# Altium PCB LED ring V1.PcbDoc
Units mm, origin at the board's own origin, x right, y up, seen from the top; angles counter-clockwise.
Board outline 116 x 70.3 mm, 2 copper layers (Top Layer, Bottom Layer); 46 components, 54 nets, 171 pads, 94 vias.
Unrouted connection lines stored in the file: 3.
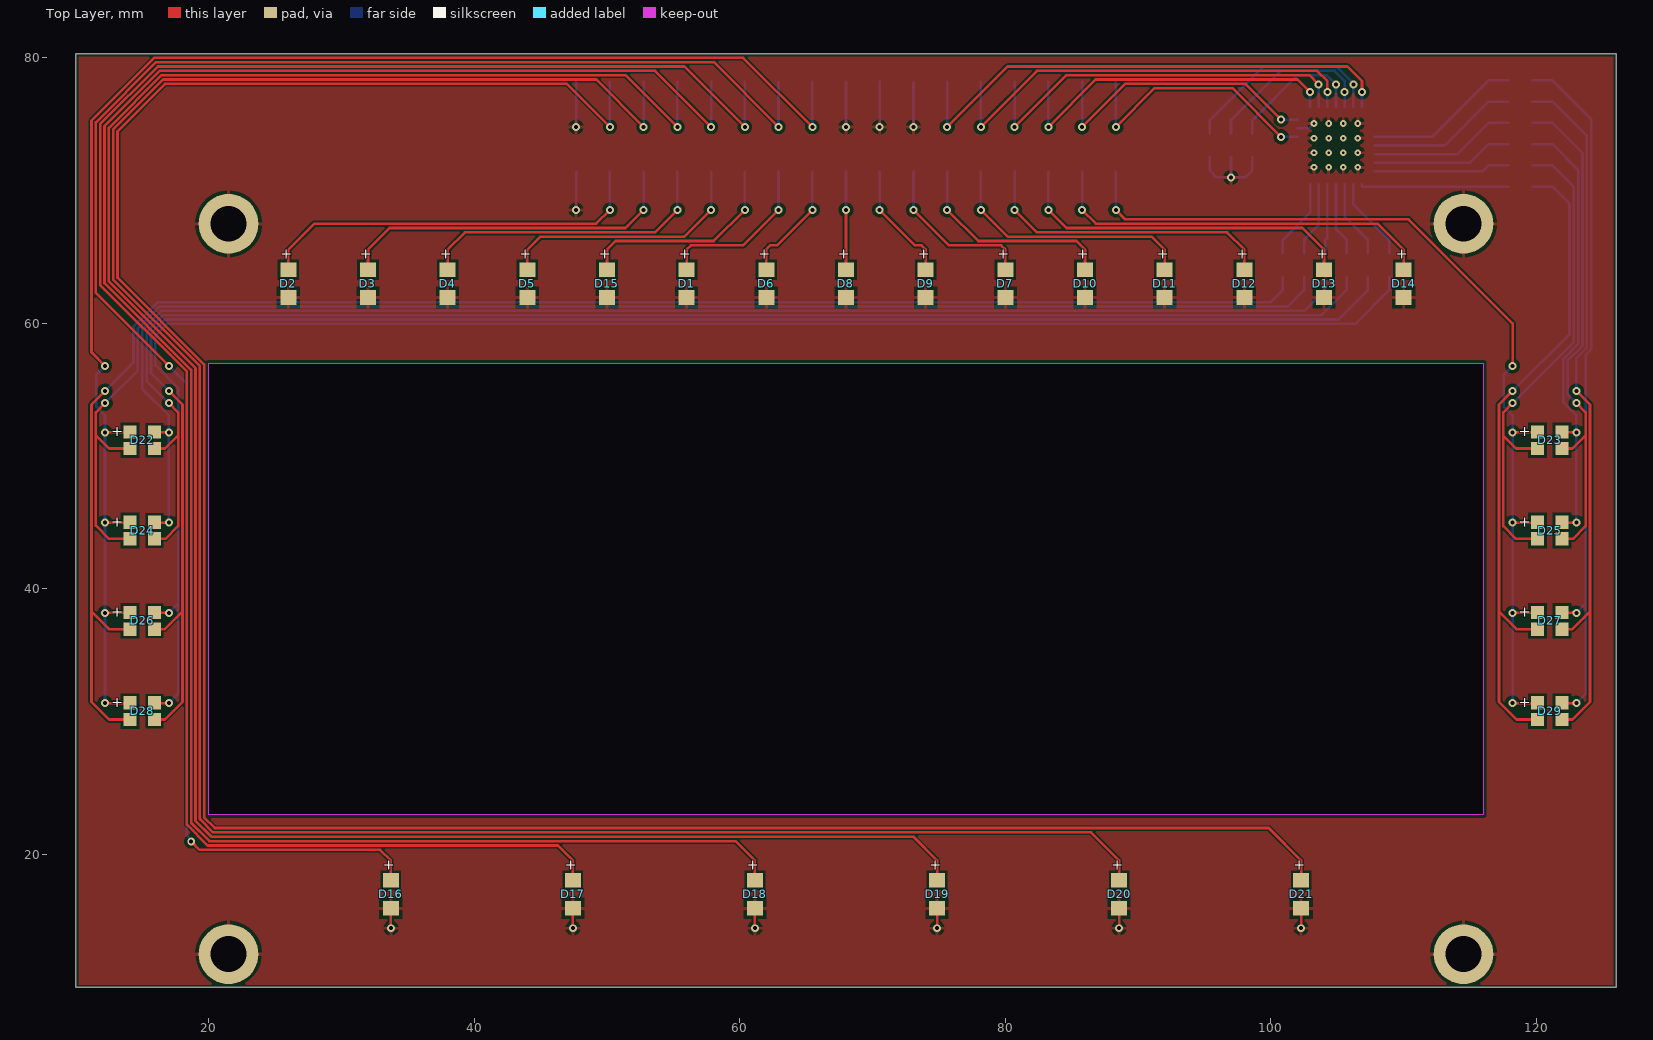
[diagram p0: Top Layer view]
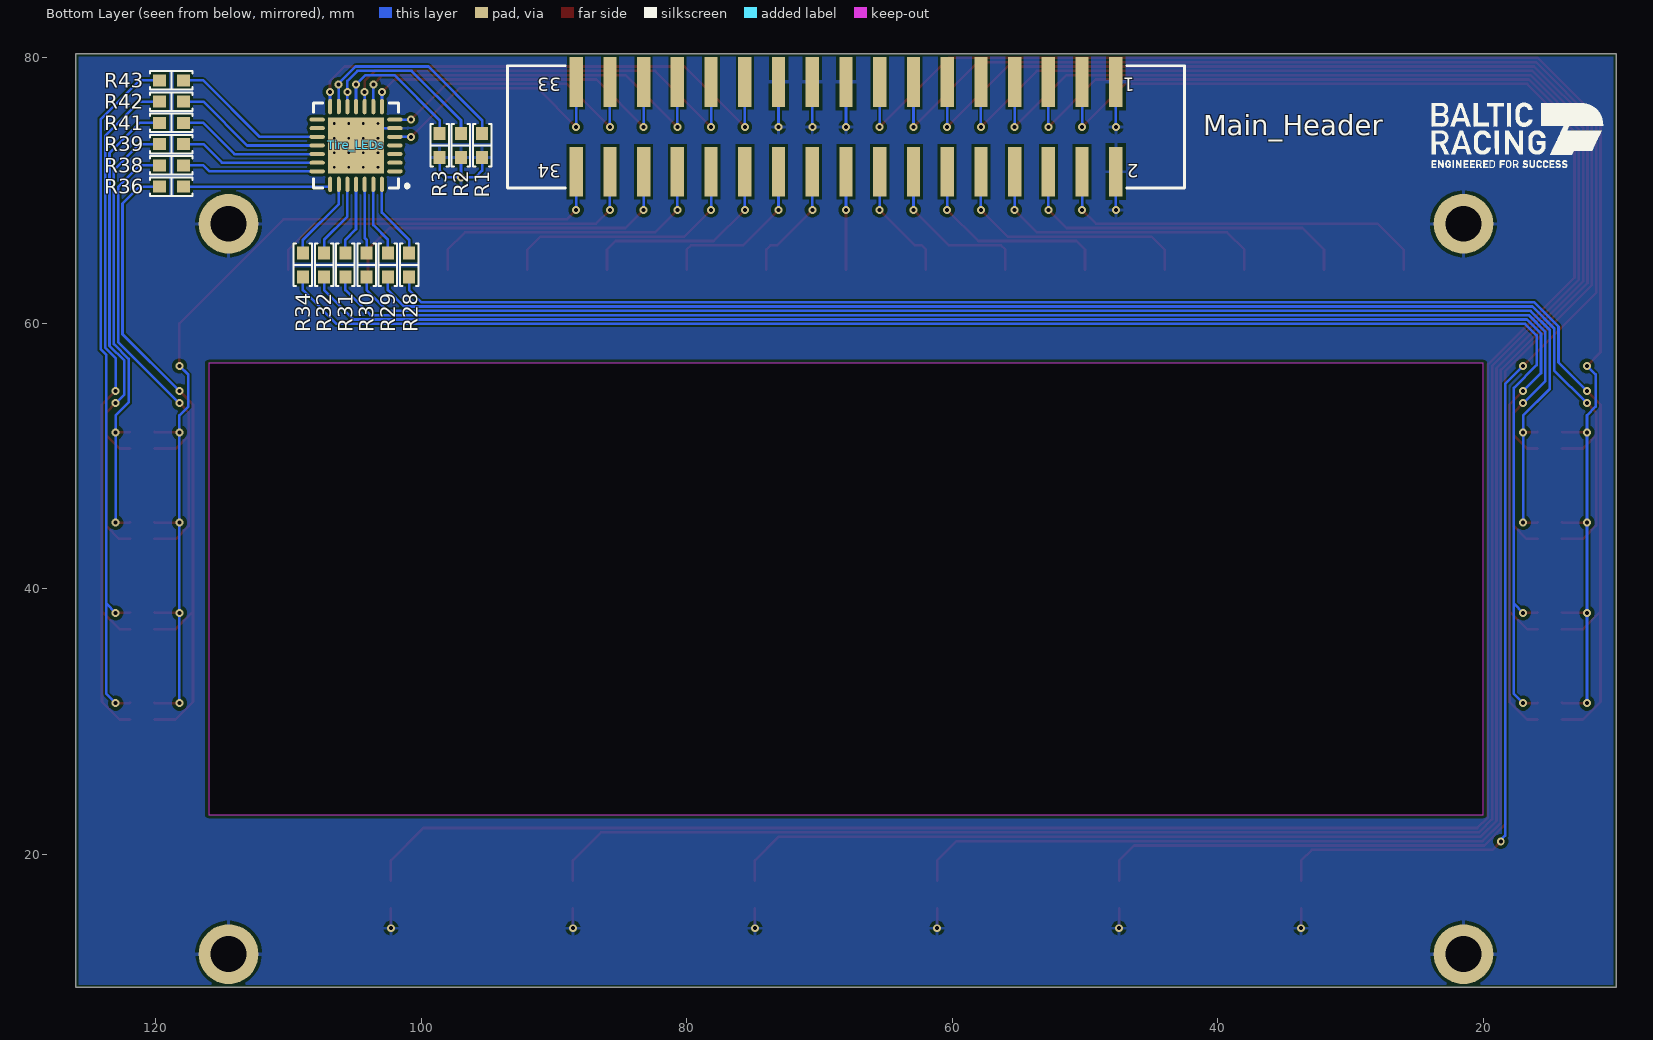
[diagram p1: Bottom Layer view, seen from below]
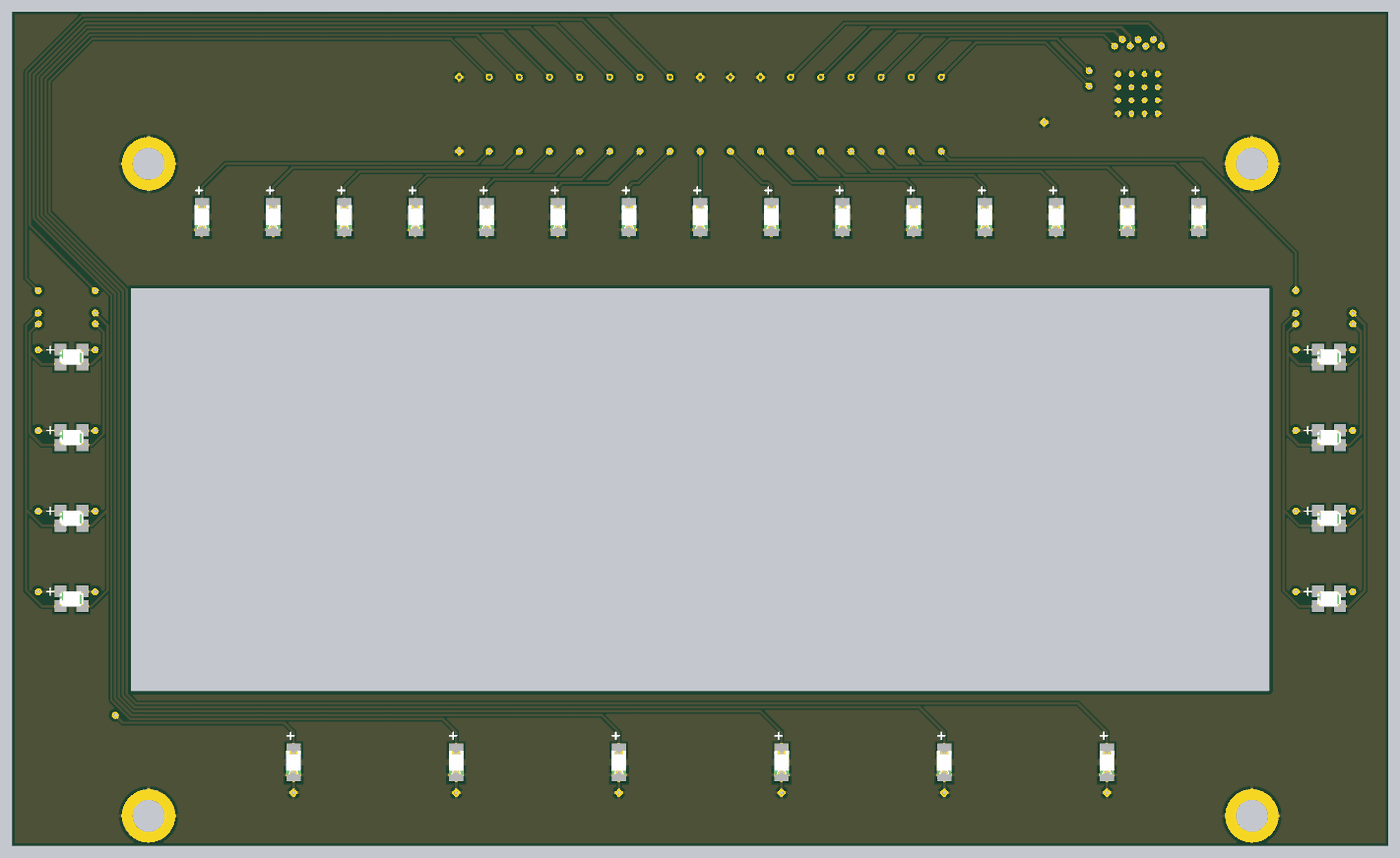
[diagram p2: 3D render of the assembled board from above, using the file's embedded part models]
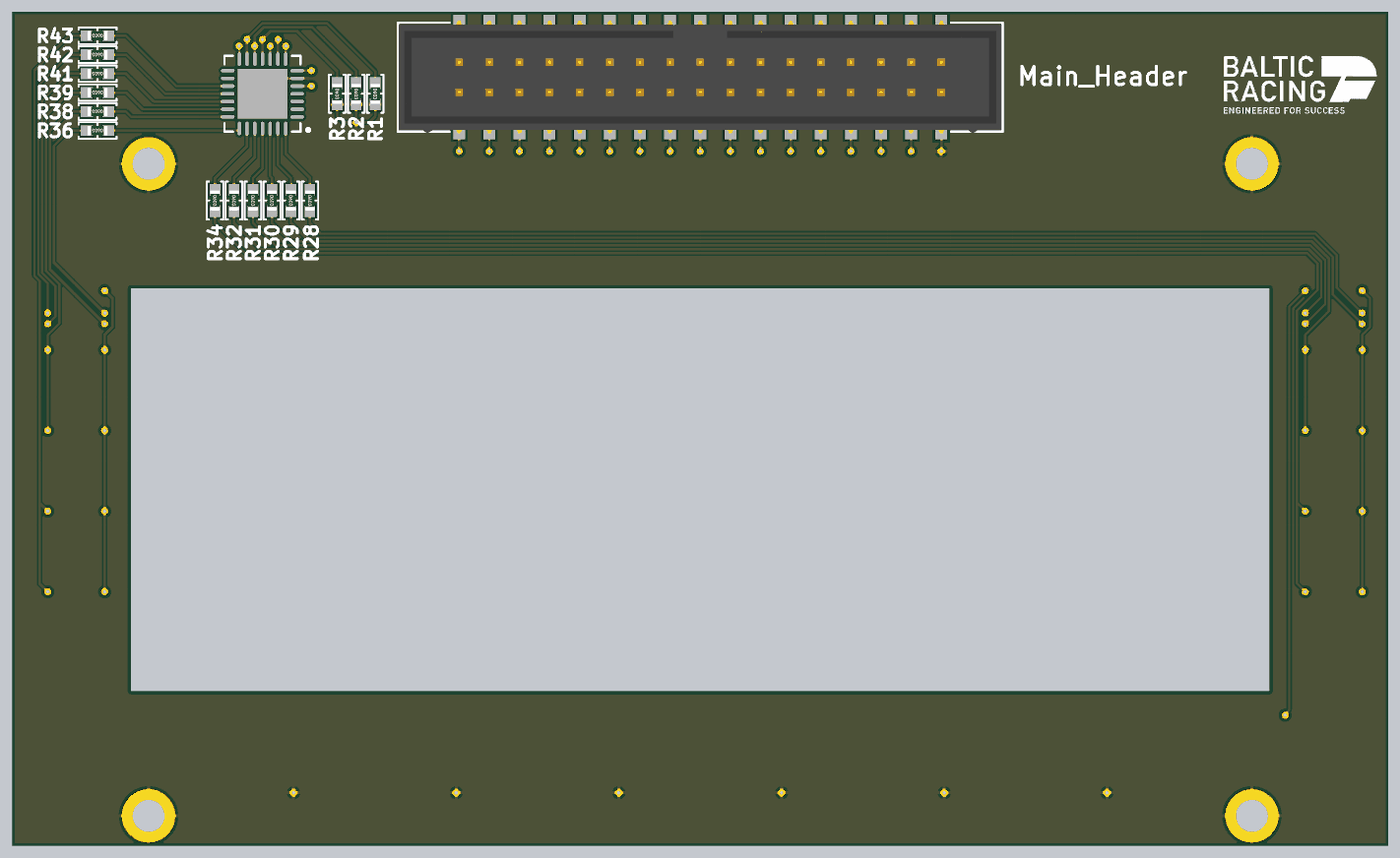
[diagram p3: 3D render of the assembled board from below, using the file's embedded part models]

## Layer stack, top to bottom
Top Solder: solder mask 0.0102, Solder Resist, Dk 3.5
Top Layer: signal copper 0.0356
Dielectric 1: dielectric 0.32, FR-4, Dk 4.8
Bottom Layer: signal copper 0.0356
Bottom Solder: solder mask 0.0102, Solder Resist, Dk 3.5

## Board outline
10,10 126,10 126,80.3 10,80.3
cut-out: 20,57 116,57 116,23 20,23

## Design rules (kind name [scope] priority, off if disabled: settings)
BoardOutlineClearance [All] p1: gap=0.2 ignorepadtopadclearanceinfootprint=FALSE // Trace to V-cut >0.4mm
Clearance [All] p1: gap=0.254 ignorepadtopadclearanceinfootprint=TRUE except(0: Arc-Hole Track-Hole SMDPad-Hole THPad-Hole Via-Hole Fill-Hole Poly-Hole Region-Hole Text-Hole; 0.127: Arc-Arc Arc-Track Arc-Fill Arc-Poly Arc-Region Track-Track Track-Fill Track-Poly Track-Region SMDPad-SMDPad; 0.15: Arc-Text Track-Text SMDPad-Text THPad-Text Via-Text Fill-Text Poly-Text Region-Text Text-Text; 0.2: Arc-SMDPad Track-SMDPad SMDPad-Fill SMDPad-Poly SMDPad-Region; 0.33: Arc-THPad Track-THPad THPad-Fill THPad-Poly THPad-Region; 0.5: SMDPad-THPad THPad-THPad THPad-Via)
DiffPairsRouting [All] p1: maxlimit=10 minlimit=0.254 mostfreqgap=0.254 toplayer_minwidth=0.127 toplayer_maxwidth=5 toplayer_prefwidth=0.254 bottomlayer_minwidth=0.127 bottomlayer_maxwidth=5 bottomlayer_prefwidth=0.254 maxuncoupledlength=12.7
HoleSize [All] p1: absolutevalues=TRUE maxlimit=6.3 minlimit=0.2 maxpercent=80.000 minpercent=20.000 // Finished hole size tolerance +0.13/-0.08mm
HoleToHoleClearance [All] p1: gap=0.5 allowstackedmicrovias=TRUE
MinimumAnnularRing [All] p1: minimumring=0.13 // 1oz Copper
PolygonConnect [All] p1: connectstyle=Relief reliefconductorwidth=0.254 reliefentries=4 polygonreliefangle="90 Angle" airgapwidth=0.254
RoutingVias [All] p1: holewidth=0.711 width=1.27 viastyle="Through Hole" minholewidth=0.3 minwidth=0.6 maxholewidth=0.711 maxwidth=1.27
SolderMaskExpansion [All] p1: expansion=0.05 istentingtop=FALSE
Width [All] p1: maxlimit=4.5 minlimit=0.1 preferedwidth=0.254 minimp=50.000000 maximp=50.000000 favimp=50.000000
27 further rules are at their usual default settings.

## Components (designator, comment, footprint, x,y, rotation, side; value= is the part's Value field where it differs from the comment)
D1 "Red, 2V" WL-SMCW_0805 56,63 r90 top
D2 "Blue, 3.2V" WL-SMCW_0805 26,63 r90 top
D3 "Blue, 3.2V" WL-SMCW_0805 32,63 r90 top
D4 "Blue, 3.2V" WL-SMCW_0805 38,63 r90 top
D5 "Blue, 3.2V" WL-SMCW_0805 44,63 r90 top
D6 "Red, 2V" WL-SMCW_0805 62,63 r90 top
D7 "Green, 3.2V" WL-SMCW_0805 80,63 r90 top
D8 "Yellow, 2V" WL-SMCW_0805 68,63 r90 top
D9 "Yellow, 2V" WL-SMCW_0805 74,63 r90 top
D10 "Green, 3.2V" WL-SMCW_0805 86,63 r90 top
D11 "Green, 3.2V" WL-SMCW_0805 92,63 r90 top
D12 "Green, 3.2V" WL-SMCW_0805 98,63 r90 top
D13 "Green, 3.2V" WL-SMCW_0805 104,63 r90 top
D14 "Green, 3.2V" WL-SMCW_0805 110,63 r90 top
D15 "Blue, 3.2V" WL-SMCW_0805 50,63 r90 top
D16 "Red, 2V" WL-SMCW_0805 33.72,17 r90 top
D17 "Red, 2V" WL-SMCW_0805 47.43,17 r90 top
D18 "Red, 2V" WL-SMCW_0805 61.14,17 r90 top
D19 "Red, 2V" WL-SMCW_0805 74.86,17 r90 top
D20 "Red, 2V" WL-SMCW_0805 88.57,17 r90 top
D21 "Red, 2V" WL-SMCW_0805 102.28,17 r90 top
D22 "Red & Green & Blue" WL-SFCW_0805 15,51.2 r0 top
D23 "Red & Green & Blue" WL-SFCW_0805 121,51.2 r0 top
D24 "Red & Green & Blue" WL-SFCW_0805 15,44.4 r0 top
D25 "Red & Green & Blue" WL-SFCW_0805 121,44.4 r0 top
D26 "Red & Green & Blue" WL-SFCW_0805 15,37.6 r0 top
D27 "Red & Green & Blue" WL-SFCW_0805 121,37.6 r0 top
D28 "Red & Green & Blue" WL-SFCW_0805 15,30.8 r0 top
D29 "Red & Green & Blue" WL-SFCW_0805 121,30.8 r0 top
Main_Header "61233420621" 61233420621 68,74.8 r0 bottom
R1 "SMD Resistor" "STACKPOLE CSR0603" 95.4,73.4 r270 bottom value=10k
R2 "SMD Resistor" "STACKPOLE CSR0603" 97,73.4 r270 bottom value=10k
R3 "SMD Resistor" "STACKPOLE CSR0603" 98.6,73.4 r270 bottom value=10k
R28 "SMD Resistor" "STACKPOLE CSR0603" 100.9,64.4 r270 bottom value=120
R29 "SMD Resistor" "STACKPOLE CSR0603" 102.5,64.4 r270 bottom value=120
R30 "SMD Resistor" "STACKPOLE CSR0603" 104.1,64.4 r270 bottom value=270
R31 "SMD Resistor" "STACKPOLE CSR0603" 105.7,64.4 r270 bottom value=470
R32 "SMD Resistor" "STACKPOLE CSR0603" 107.3,64.4 r270 bottom value=470
R34 "SMD Resistor" "STACKPOLE CSR0603" 108.9,64.4 r270 bottom value=270
R36 "SMD Resistor" "STACKPOLE CSR0603" 118.8,70.3 r0 bottom value=120
R38 "SMD Resistor" "STACKPOLE CSR0603" 118.8,71.9 r0 bottom value=120
R39 "SMD Resistor" "STACKPOLE CSR0603" 118.8,73.5 r0 bottom value=270
R41 "SMD Resistor" "STACKPOLE CSR0603" 118.8,75.1 r0 bottom value=470
R42 "SMD Resistor" "STACKPOLE CSR0603" 118.8,76.7 r0 bottom value=470
R43 "SMD Resistor" "STACKPOLE CSR0603" 118.8,78.3 r0 bottom value=270
Tire_LEDs "MCP23S17T-E/ML" QFN-ML28_M 104.9,73.4 r0 bottom

## Footprints (in the part's own frame and the unit in brackets; to place one, negate y for a bottom-side part, rotate by r counter-clockwise, add the part's x,y. Pads: shape width x height; smd on the part's side, far side on the other; paste and mask are expansions set on the pad)
61233420621 [mm] "WR-BHD 2.54mm Male SMT Box Header (Reel), 34p"
  rect 1x3.75 smd: 1(-20.32,-3.375) 2(-20.32,3.375) 3(-17.78,-3.375) 4(-17.78,3.375) 5(-15.24,-3.375) 6(-15.24,3.375) 7(-12.7,-3.375) 8(-12.7,3.375) 9(-10.16,-3.375) 10(-10.16,3.375) 11(-7.62,-3.375) 12(-7.62,3.375) 13(-5.08,-3.375) 14(-5.08,3.375) 15(-2.54,-3.375) 16(-2.54,3.375) 17(0,-3.375) 18(0,3.375) 19(2.54,-3.375) 20(2.54,3.375) 21(5.08,-3.375) 22(5.08,3.375) 23(7.62,-3.375) 24(7.62,3.375) 25(10.16,-3.375) 26(10.16,3.375) 27(12.7,-3.375) 28(12.7,3.375) 29(15.24,-3.375) 30(15.24,3.375) 31(17.78,-3.375) 32(17.78,3.375) 33(20.32,-3.375) 34(20.32,3.375)
  silkscreen extent -25.49,-4.6 25.49,4.6, body extent -25.4,-4.75 25.4,4.75, height 10.55
QFN-ML28_M [mm] "QFN, 28-Leads, Body 6x6mm, Pitch 0.65mm, Thermal Pad 4.2x4.2mm, IPC Low Density"
  oval 1.15x0.3 smd: 1(-2.925,1.95) 2(-2.925,1.3) 3(-2.925,0.65) 4(-2.925,0) 5(-2.925,-0.65) 6(-2.925,-1.3) 7(-2.925,-1.95) 15(2.925,-1.95) 16(2.925,-1.3) 17(2.925,-0.65) 18(2.925,0) 19(2.925,0.65) 20(2.925,1.3) 21(2.925,1.95)
  oval 0.3x1.15 smd: 8(-1.95,-2.925) 9(-1.3,-2.925) 10(-0.65,-2.925) 11(0,-2.925) 12(0.65,-2.925) 13(1.3,-2.925) 14(1.95,-2.925) 22(1.95,2.925) 23(1.3,2.925) 24(0.65,2.925) 25(0,2.925) 26(-0.65,2.925) 27(-1.3,2.925) 28(-1.95,2.925)
  rect 4.2x4.2 smd: 29(0,0)
  silkscreen extent -3.97,-3.2 3.2,3.2, body extent -3.05,-3.05 3.05,3.05, height 1
"STACKPOLE CSR0603" [mm] "Chip Resistor, 2-Leads, Body 1.60x0.80mm, IPC Medium Density"
  rect 1x0.9 smd: 1(-0.9,0) 2(0.9,0)
  silkscreen extent -1.6,-0.7 1.6,0.7, body extent -0.85,-0.4 0.85,0.4, height 0.45
WL-SFCW_0805 [mm] "SMD Full-color Chip LED Waterclear, body 2x1.3mm"
  rect 1x1 smd: 1(0.925,0.625) 2(0.925,-0.625) 3(-0.925,-0.625) 4(-0.925,0.625)
  body extent -1,-0.65 1,0.65, height 0.5
WL-SMCW_0805 [mm] "SMD Mono-color Chip LED, body 2.0x1.25mm"
  rect 1.1x1.2 smd: 1(-1.05,0) 2(1.05,0)
  body extent -1,-0.63 1,0.62, height 0.7

## Part data
D1 D6 D16 D17 D18 D19 D20 D21: library part 150080RS75000, "WL-SMCW SMT Mono-color Chip LED Waterclear, size 0805, Red, 2V, 140deg", Emitting Color=Red, Forward Voltage typ.=2V, Operating Temperature="-40 to +85degC", Chip Technology=AlInGaP, ComponentLink1Description=Manufacturer, ComponentLink1URL=http://www.we-online.de, ComponentLink2Description=Datasheet, ComponentLink2URL=https://www.we-online.com/catalog/datasheet/150080RS75000.pdf, Dominant Wavelength typ.=625nm, Luminous Intensity typ.=150mcd, Mounting Technology=SMT, Packaging="Tape and Reel", Part Number=150080RS75000, Peak Wavelength typ.=630nm, Published Date="December 2019", Publisher="Wurth Elektronik", Size=0805, Viewing Angle=140deg
D2 D3 D4 D5 D15: library part 150080BS75000, "WL-SMCW SMT Mono-color Chip LED Waterclear, size 0805, Blue, 3.2V, 140deg", Emitting Color=Blue, Forward Voltage typ.=3.2V, Operating Temperature="-40 to +85degC", Chip Technology=InGaN, ComponentLink1Description=Manufacturer, ComponentLink1URL=http://www.we-online.de, ComponentLink2Description=Datasheet, ComponentLink2URL=https://www.we-online.com/catalog/datasheet/150080BS75000.pdf, Dominant Wavelength typ.=470nm, Luminous Intensity typ.=145mcd, Mounting Technology=SMT, Packaging="Tape and Reel", Part Number=150080BS75000, Peak Wavelength typ.=465nm, Published Date="December 2019", Publisher="Wurth Elektronik", Size=0805, Viewing Angle=140deg
D7 D10 D11 D12 D13 D14: library part 150080GS75000, "WL-SMCW SMT Mono-color Chip LED Waterclear, size 0805, Green, 3.2V, 140deg", Emitting Color=Green, Forward Voltage typ.=3.2V, Operating Temperature="-40 to +85degC", Chip Technology=InGaN, ComponentLink1Description=Manufacturer, ComponentLink1URL=http://www.we-online.de, ComponentLink2Description=Datasheet, ComponentLink2URL=https://www.we-online.com/catalog/datasheet/150080GS75000.pdf, Dominant Wavelength typ.=525nm, Luminous Intensity typ.=450mcd, Mounting Technology=SMT, Packaging="Tape and Reel", Part Number=150080GS75000, Peak Wavelength typ.=515nm, Published Date="December 2019", Publisher="Wurth Elektronik", Size=0805, Viewing Angle=140deg
D8 D9: library part 150080YS75000, "WL-SMCW SMT Mono-color Chip LED Waterclear, size 0805, Yellow, 2V, 140deg", Emitting Color=Yellow, Forward Voltage typ.=2V, Operating Temperature="-40 to +85degC", Chip Technology=AlInGaP, ComponentLink1Description=Manufacturer, ComponentLink1URL=http://www.we-online.de, ComponentLink2Description=Datasheet, ComponentLink2URL=https://www.we-online.com/catalog/datasheet/150080YS75000.pdf, Dominant Wavelength typ.=590nm, Luminous Intensity typ.=120mcd, Mounting Technology=SMT, Packaging="Tape and Reel", Part Number=150080YS75000, Peak Wavelength typ.=595nm, Published Date="December 2019", Publisher="Wurth Elektronik", Size=0805, Viewing Angle=140deg
D22 D23 D24 D25 D26 D27 D28 D29: library part 150080M173000, "WL-SFCW SMT Full-color Chip LED Waterclear, size 0805, Red & Green & Blue, 120deg", Forward Voltage typ.="Blue:3.3V, Green:3.3V, Red:2V", Operating Temperature="-40 to +85degC", Chip Technology="AlInGaP + InGaN", ComponentLink1Description=Manufacturer, ComponentLink1URL=http://www.we-online.de, ComponentLink2Description=Datasheet, ComponentLink2URL=https://www.we-online.com/catalog/datasheet/150080M173000.pdf, Dominant Wavelength typ.="Blue:470nm, Green:525nm, Red:624nm", Emitting Color="Red & Green & Blue", Luminous Intensity typ.="Blue:70mcd, Green:285mcd, Red:112mcd", Mounting Technology=SMT, Packaging="Tape and Reel", Part Number=150080M173000, Peak Wavelength typ.="Blue:468nm, Green:520nm, Red:632nm", Published Date="December 2019", Publisher="Wurth Elektronik", Size=0805, Viewing Angle=120deg
Main_Header: "WR-BHD Box Header, Male PCB side, pitch 2.54mm, SMT, Straight, 34p", Contact Resistance=20mOhm, Insulation Resistance=1000MOhm, Manufacturer="Wurth Elektronik", Operating Temperature="-40 to +125degC", Rated Current=3A, Withstanding Voltage=500VAC, Working Voltage=250VAC, ComponentLink1Description=Manufacturer, ComponentLink1URL=http://www.we-online.de, ComponentLink2Description=Datasheet, ComponentLink2URL=https://www.we-online.com/catalog/datasheet/61233420621.pdf, Gender="Male PCB side", Length=50.98mm, Manufacturer Part Number=61233420621, Mounting Technology=SMT, Packaging="Tape and Reel with Cap", Pin Number=34, Pitch=2.54mm, Published Date="August 2021", System=Connector, Type=Straight
R1 R2 R3 R28 R29 R30 R31 R32 R34 R36 R38 R39 R41 R42 R43: "Resistor with multiple footprints"
Tire_LEDs: library part CMP-0186-00026-2, "16-Bit I/O Expander with Serial Interface, 28-Pin QFN, Extended Temperature, Tape and Reel", Code_JEDEC=MO-220, ComponentLink1Description="Manufacturer URL", ComponentLink1URL=http://www.microchip.com/, ComponentLink2Description=Datasheet, ComponentLink2URL=http://ww1.microchip.com/downloads/en/DeviceDoc/21952a.pdf, ComponentLink3Description="Package Specification", ComponentLink3URL=http://www.microchip.com/stellent/groups/techpub_sg/documents/packagingspec/en012702.pdf, DatasheetVersion="revB, Feb-2007", PackageDescription="28-Lead Plastic Quad Flat, No Lead Package (ML) - 6x6 mm Body [QFN] with 0.55 mm Contact Length", PackageReference=QFN-ML28, PackageVersion="revBB, Aug-2009", RevisionNote="URLs added. Sch pin type corrected."

## Free pads (board coordinates)
  round 4.5 hole 2.7: 2(114.5,67.5) 3(114.5,12.5) 4(21.5,12.5) 5(21.5,67.5)

## Via types
v1: diameter 0.6, hole 0.3, Top Layer to Bottom Layer, 78 vias
v2: diameter 0.5, hole 0.2, Top Layer to Bottom Layer, 16 vias

## Nets (pads, with @x,y where several pads share a name; then routed paths per layer and width w, separated by ;. In a path a pad name is that pad's centre, name@x,y a point inside that pad or via, vN(x,y) a via of type N, cw(c..) or ccw(c..) an arc to the next point about the centre after c; other vN are vias at no path point)
+5V: D22.4 D23.4 D24.4 D25.4 D26.4 D27.4 D28.4 D29.4 Main_Header.15 Main_Header.23 Main_Header.33 Main_Header.34 Tire_LEDs.5 Tire_LEDs.14 | length 245.8
  Top Layer w0.2: v1(12.2,31.4) 14.05,31.4 D28.4 ; v1(12.2,38.2) 14.05,38.2 D26.4 ; v1(12.2,45) 14.05,45 D24.4 ; v1(12.2,51.8) 14.05,51.8 D22.4 ; v1(12.2,56.8) 11.173,57.827 11.173,75.271 15.902,80 60.26,80 v1(65.46,74.8) ; v1(75.62,74.8) 80.166,79.346 105.764,79.346 106.862,78.248 v1(106.862,77.425) ; v1(88.32,68.55) 89.031,67.839 110.361,67.839 118.2,60 v1(118.2,56.8) ; v1(88.32,74.8) 91.231,77.711 97.114,77.711 v1(100.775,74.05) ; v1(118.2,31.4) 120.05,31.4 D29.4 ; v1(118.2,38.2) 120.05,38.2 D27.4 ; v1(118.2,45) 120.05,45 D25.4 ; v1(118.2,51.8) 120.05,51.8 D23.4
  Bottom Layer w0.2: v1(12.2,31.4) v1(12.2,38.2) v1(12.2,45) v1(12.2,51.8) 12.2,53.075 11.546,53.729 11.546,56.146 v1(12.2,56.8) ; v1(65.46,74.8) Main_Header.15 ; v1(75.62,74.8) Main_Header.23 ; v1(88.32,68.55) Main_Header.34 ; v1(88.32,74.8) Main_Header.33 ; v1(100.775,74.05) Tire_LEDs.5 ; Tire_LEDs.14 106.856,76.331 106.856,77.419 v1(106.862,77.425) ; v1(118.2,31.4) v1(118.2,38.2) v1(118.2,45) v1(118.2,51.8) 118.2,53.075 117.534,53.742 117.534,56.134 v1(118.2,56.8)
batt_led_1: D1.2 Main_Header.14 | length 12.5
  Top Layer w0.2: D1.2 56,65.55 56.327,65.877 60.247,65.877 v1(62.92,68.55)
  Bottom Layer w0.2: v1(62.92,68.55) Main_Header.14
batt_led_2: D6.2 Main_Header.16 | length 9.1
  Top Layer w0.2: D6.2 62,65.59 62.287,65.877 62.787,65.877 v1(65.46,68.55)
  Bottom Layer w0.2: v1(65.46,68.55) Main_Header.16
batt_led_3: D8.2 Main_Header.18 | length 7.4
  Top Layer w0.2: D8.2 v1(68,68.55)
  Bottom Layer w0.2: v1(68,68.55) Main_Header.18
batt_led_4: D9.2 Main_Header.20 | length 9.1
  Top Layer w0.2: v1(70.54,68.55) 73.213,65.877 73.693,65.877 74,65.57 D9.2
  Bottom Layer w0.2: v1(70.54,68.55) Main_Header.20
batt_led_5: D7.2 Main_Header.22 | length 12.5
  Top Layer w0.2: v1(73.08,68.55) 75.753,65.877 79.673,65.877 80,65.55 D7.2
  Bottom Layer w0.2: v1(73.08,68.55) Main_Header.22
batt_led_6: D10.2 Main_Header.24 | length 16
  Top Layer w0.2: v1(75.62,68.55) 77.966,66.204 85.346,66.204 86,65.55 D10.2
  Bottom Layer w0.2: v1(75.62,68.55) Main_Header.24
batt_led_7: D11.2 Main_Header.26 | length 19.5
  Top Layer w0.2: v1(78.16,68.55) 80.179,66.531 91.019,66.531 92,65.55 D11.2
  Bottom Layer w0.2: v1(78.16,68.55) Main_Header.26
batt_led_8: D12.2 Main_Header.28 | length 22.9
  Top Layer w0.2: v1(80.7,68.55) 82.392,66.858 96.692,66.858 98,65.55 D12.2
  Bottom Layer w0.2: v1(80.7,68.55) Main_Header.28
batt_led_9: D13.2 Main_Header.30 | length 26.4
  Top Layer w0.2: v1(83.24,68.55) 84.605,67.185 102.365,67.185 104,65.55 D13.2
  Bottom Layer w0.2: v1(83.24,68.55) Main_Header.30
batt_led_10: D14.2 Main_Header.32 | length 29.8
  Top Layer w0.2: v1(85.78,68.55) 86.818,67.512 108.038,67.512 110,65.55 D14.2
  Bottom Layer w0.2: v1(85.78,68.55) Main_Header.32
free_led_1: D2.2 Main_Header.4 | length 29.8
  Top Layer w0.2: D2.2 26,65.55 27.962,67.512 49.182,67.512 v1(50.22,68.55)
  Bottom Layer w0.2: v1(50.22,68.55) Main_Header.4
free_led_2: D3.2 Main_Header.6 | length 26.4
  Top Layer w0.2: D3.2 32,65.55 33.635,67.185 51.395,67.185 v1(52.76,68.55)
  Bottom Layer w0.2: v1(52.76,68.55) Main_Header.6
free_led_3: D4.2 Main_Header.8 | length 22.9
  Top Layer w0.2: D4.2 38,65.55 39.308,66.858 53.608,66.858 v1(55.3,68.55)
  Bottom Layer w0.2: v1(55.3,68.55) Main_Header.8
free_led_4: D5.2 Main_Header.10 | length 19.5
  Top Layer w0.2: D5.2 44,65.55 44.981,66.531 55.821,66.531 v1(57.84,68.55)
  Bottom Layer w0.2: v1(57.84,68.55) Main_Header.10
free_led_5: D15.2 Main_Header.12 | length 16
  Top Layer w0.2: D15.2 50,65.55 50.654,66.204 58.034,66.204 v1(60.38,68.55)
  Bottom Layer w0.2: v1(60.38,68.55) Main_Header.12
GND: D1.1 D2.1 D3.1 D4.1 D5.1 D6.1 D7.1 D8.1 D9.1 D10.1 D11.1 D12.1 D13.1 D14.1 D15.1 D16.1 D17.1 D18.1 D19.1 D20.1 D21.1 Main_Header.1 Main_Header.2 Main_Header.17 Main_Header.19 Main_Header.21 pad.2 pad.3 pad.4 pad.5 R1.2 R2.2 R3.2 Tire_LEDs.6 Tire_LEDs.29 | length 33.9
  Top Layer w0.2: v1(33.72,14.45) D16.1 ; v1(47.43,14.45) D17.1 ; v1(61.14,14.45) D18.1 ; v1(74.86,14.45) D19.1 ; v1(88.57,14.45) D20.1 ; v1(102.28,14.45) D21.1
  Bottom Layer w0.2: v1(47.68,68.55) Main_Header.2 ; v1(47.68,74.8) Main_Header.1 ; v1(68,74.8) Main_Header.17 ; v1(70.54,74.8) Main_Header.19 ; v1(73.08,74.8) Main_Header.21 ; R1.2 95.4,71.5 95.9,71 v1(97,71) ; R2.2 v1(97,71) ; R3.2 98.6,71.5 98.1,71 v1(97,71) ; Tire_LEDs.6 102.9,74.7 v2(103.25,75.05)
  other v2: 103.25,71.75 104.35,71.75 105.45,71.75 106.55,71.75 103.25,72.85 104.35,72.85 105.45,72.85 106.55,72.85 103.25,73.95 104.35,73.95 105.45,73.95 106.55,73.95 104.35,75.05 105.45,75.05 106.55,75.05
info_led_1: D16.2 Main_Header.13 | length 132.9
  Top Layer w0.2: v1(17,56.8) 11.5,62.3 11.5,75.135 16.038,79.673 58.047,79.673 v1(62.92,74.8) ; v1(18.69,20.99) 19.322,20.358 32.912,20.358 33.72,19.55 D16.2
  Bottom Layer w0.2: v1(17,56.8) 18.354,55.446 18.354,21.434 18.69,21.098 v1(18.69,20.99) ; v1(62.92,74.8) Main_Header.13
info_led_2: D17.2 Main_Header.11 | length 142.8
  Top Layer w0.2: D17.2 47.43,19.55 46.295,20.685 19.928,20.685 18.354,22.259 18.354,56.371 11.827,62.898 11.827,75 16.173,79.346 55.834,79.346 v1(60.38,74.8)
  Bottom Layer w0.2: v1(60.38,74.8) Main_Header.11
info_led_3: D18.2 Main_Header.9 | length 152.8
  Top Layer w0.2: v1(57.84,74.8) 53.621,79.019 16.308,79.019 12.154,74.865 12.154,63.033 18.681,56.506 18.681,22.394 20.063,21.012 59.678,21.012 61.14,19.55 D18.2
  Bottom Layer w0.2: v1(57.84,74.8) Main_Header.9
info_led_4: D19.2 Main_Header.7 | length 162.9
  Top Layer w0.2: v1(55.3,74.8) 51.408,78.692 16.444,78.692 12.481,74.729 12.481,63.169 19.008,56.642 19.008,22.53 20.199,21.339 73.071,21.339 74.86,19.55 D19.2
  Bottom Layer w0.2: v1(55.3,74.8) Main_Header.7
info_led_5: D20.2 Main_Header.5 | length 173
  Top Layer w0.2: v1(52.76,74.8) 49.195,78.365 16.579,78.365 12.808,74.594 12.808,63.304 19.335,56.777 19.335,22.665 20.334,21.666 86.454,21.666 88.57,19.55 D20.2
  Bottom Layer w0.2: v1(52.76,74.8) Main_Header.5
info_led_6: D21.2 Main_Header.3 | length 183.1
  Top Layer w0.2: v1(50.22,74.8) 46.982,78.038 16.715,78.038 13.135,74.458 13.135,63.44 19.662,56.913 19.662,22.8 20.469,21.993 99.837,21.993 102.28,19.55 D21.2
  Bottom Layer w0.2: v1(50.22,74.8) Main_Header.3
MISO: Main_Header.27 Tire_LEDs.9 | length 29.8
  Top Layer w0.2: v1(80.7,74.8) 84.592,78.692 102.893,78.692 103.592,77.993 v1@103.592,77.985
  Bottom Layer w0.2: v1(80.7,74.8) Main_Header.27 ; v1@103.592,77.985 103.592,76.333 Tire_LEDs.9
  other v1: 103.592,77.977
MOSI: Main_Header.25 Tire_LEDs.10 | length 33.5
  Top Layer w0.2: v1(78.16,74.8) 82.379,79.019 103.483,79.019 104.246,78.256 v1(104.246,77.425)
  Bottom Layer w0.2: v1(78.16,74.8) Main_Header.25 ; v1(104.246,77.425) 104.248,77.423 104.248,76.327 Tire_LEDs.10
NetR1_1: R1.1 Tire_LEDs.13 | length 15.8
  Bottom Layer w0.2: R1.1 95.4,75.3 99.446,79.346 104.926,79.346 106.208,78.064 v1(106.208,77.977) 106.208,76.333 Tire_LEDs.13
NetR2_1: R2.1 Tire_LEDs.12 | length 13.3
  Bottom Layer w0.2: R2.1 97,75.3 100.719,79.019 104.791,79.019 105.554,78.256 v1(105.554,77.425) 105.552,77.423 105.552,76.327 Tire_LEDs.12
NetR3_1: R3.1 Tire_LEDs.11 | length 10.7
  Bottom Layer w0.2: R3.1 98.6,75.3 101.992,78.692 104.193,78.692 104.9,77.985 Tire_LEDs.11
  other v1: 104.9,77.977
NetR28_1: R28.1 Tire_LEDs.28 | length 6
  Bottom Layer w0.2: R28.1 100.9,66.3 102.95,68.35 Tire_LEDs.28
NetR29_1: R29.1 Tire_LEDs.27 | length 5.6
  Bottom Layer w0.2: R29.1 102.5,66.3 103.6,67.4 Tire_LEDs.27
NetR30_1: R30.1 Tire_LEDs.26 | length 5.2
  Bottom Layer w0.2: R30.1 104.1,66.3 104.25,66.45 Tire_LEDs.26
NetR31_1: R31.1 Tire_LEDs.25 | length 5.5
  Bottom Layer w0.2: Tire_LEDs.25 104.9,67.1 105.7,66.3 R31.1
NetR32_1: R32.1 Tire_LEDs.24 | length 5.9
  Bottom Layer w0.2: Tire_LEDs.24 105.55,68.05 107.3,66.3 R32.1
NetR34_1: R34.1 Tire_LEDs.23 | length 6.3
  Bottom Layer w0.2: Tire_LEDs.23 106.2,69 108.9,66.3 R34.1
NetR36_1: R36.1 Tire_LEDs.22 | length 11.2
  Bottom Layer w0.2: Tire_LEDs.22 106.85,70.346 106.896,70.3 R36.1
NetR38_1: R38.1 Tire_LEDs.21 | length 10.3
  Bottom Layer w0.2: Tire_LEDs.21 115.95,71.45 116.4,71.9 R38.1
NetR39_1: R39.1 Tire_LEDs.20 | length 10.7
  Bottom Layer w0.2: Tire_LEDs.20 115,72.1 116.4,73.5 R39.1
NetR41_1: R41.1 Tire_LEDs.19 | length 11
  Bottom Layer w0.2: Tire_LEDs.19 114.05,72.75 116.4,75.1 R41.1
NetR42_1: R42.1 Tire_LEDs.18 | length 11.4
  Bottom Layer w0.2: Tire_LEDs.18 113.1,73.4 116.4,76.7 R42.1
NetR43_1: R43.1 Tire_LEDs.17 | length 11.8
  Bottom Layer w0.2: Tire_LEDs.17 112.15,74.05 116.4,78.3 R43.1
SCK: Main_Header.29 Tire_LEDs.8 | length 26
  Top Layer w0.2: v1(83.24,74.8) 86.805,78.365 101.998,78.365 v1(102.938,77.425)
  Bottom Layer w0.2: v1(83.24,74.8) Main_Header.29 ; v1(102.938,77.425) 102.944,77.419 102.944,76.331 Tire_LEDs.8
SS: Main_Header.31 Tire_LEDs.7 | length 22
  Top Layer w0.2: v1(85.78,74.8) 89.018,78.038 98.087,78.038 v1(100.775,75.35)
  Bottom Layer w0.2: v1(85.78,74.8) Main_Header.31 ; v1(100.775,75.35) Tire_LEDs.7
tire_led_fl_blue: D22.3 D24.3 R29.2 | length 112.2
  Top Layer w0.2: v1(12.206,53.994) 12.194,53.994 11.5,53.3 11.5,51.575 ; D24.3 12.5,43.775 11.5,44.775 11.5,51.575 ; D22.3 12.5,50.575 11.5,51.575
  Bottom Layer w0.2: v1(12.206,53.994) 14.673,56.46 14.673,59.635 16.311,61.273 21.635,61.273 86.311,61.273 101.273,61.273 102.5,62.5 R29.2
tire_led_fl_green: D22.2 D24.2 R31.2 | length 112.7
  Top Layer w0.2: D24.2 16.738,43.775 17.7,44.737 17.7,51.575 ; D22.2 16.7,50.575 17.7,51.575 ; v1(17,54) 17.7,53.3 17.7,51.575
  Bottom Layer w0.2: v1(17,54) 16.987,54 15.327,55.66 15.327,59.365 16.581,60.619 103.819,60.619 105.7,62.5 R31.2
tire_led_fl_red: D22.1 D24.1 R30.2 | length 108.8
  Top Layer w0.2: D24.1 15.95,45 v1(17,45) ; D22.1 15.95,51.8 v1(17,51.8)
  Bottom Layer w0.2: v1(17,45) v1(17,51.8) 17,53.075 15,55.075 15,59.5 16.446,60.946 21.635,60.946 86.446,60.946 102.546,60.946 104.1,62.5 R30.2
tire_led_fr_blue: D23.3 D25.3 R38.2 | length 37.5
  Top Layer w0.2: v1(118.2,54) 117.5,53.3 117.5,51.537 ; D25.3 118.462,43.775 117.5,44.737 117.5,51.537 ; D23.3 118.462,50.575 117.5,51.537
  Bottom Layer w0.2: v1(118.2,54) 118.225,54 122.81,58.585 122.81,70.29 121.2,71.9 R38.2
tire_led_fr_green: D23.2 D25.2 R41.2 | length 38.2
  Top Layer w0.2: D25.2 122.738,43.775 123.7,44.737 123.7,51.537 ; D23.2 122.7,50.575 123.7,51.575 123.7,53.3 v1(123,54)
  Bottom Layer w0.2: R41.2 121.2,75.1 123.464,72.836 123.464,58.315 122.346,57.196 122.346,54.629 122.975,54 v1(123,54)
tire_led_fr_red: D23.1 D25.1 R39.2 | length 33.8
  Top Layer w0.2: D25.1 121.95,45 v1(123,45) ; D23.1 121.95,51.8 v1(123,51.8)
  Bottom Layer w0.2: R39.2 121.2,73.5 123.137,71.563 123.137,58.45 122.019,57.332 122.019,54.056 123,53.075 v1(123,51.8) v1(123,45)
tire_led_rl_blue: D26.3 D28.3 R28.2 | length 125.2
  Top Layer w0.2: v1(12.2,54.912) 11.173,53.885 11.173,38.302 ; D28.3 12.5,30.175 11.173,31.502 11.173,38.302 ; D26.3 12.5,36.975 11.173,38.302
  Bottom Layer w0.2: v1(12.2,54.912) 14.346,57.058 14.346,59.771 16.175,61.6 21.635,61.6 86.175,61.6 100,61.6 100.9,62.5 R28.2
tire_led_rl_green: D26.2 D28.2 R32.2 | length 128
  Top Layer w0.2: D28.2 16.7,30.175 18.027,31.502 18.027,38.302 ; D26.2 16.7,36.975 18.027,38.302 ; v1(17,54.912) 17.013,54.912 18.027,53.898 18.027,38.302
  Bottom Layer w0.2: v1(17,54.912) 15.654,56.258 15.654,59.229 16.717,60.292 38.1,60.292 105.092,60.292 107.3,62.5 R32.2
tire_led_rl_red: D26.1 D28.1 R34.2 | length 127.2
  Top Layer w0.2: D28.1 15.95,31.4 v1(17,31.4) ; D26.1 15.95,38.2 v1(17,38.2)
  Bottom Layer w0.2: v1(17,31.4) 17.7,32.1 17.7,38.9 ; v1(17,38.2) 17.7,38.9 ; R34.2 108.9,62.5 106.365,59.965 16.852,59.965 15.981,59.094 15.981,56.856 17.7,55.137 17.7,38.9
tire_led_rr_blue: D27.3 D29.3 R36.2 | length 49.9
  Top Layer w0.2: v1(118.2,54.9) 118.175,54.9 117.173,53.898 117.173,38.302 ; D29.3 118.5,30.175 117.173,31.502 117.173,38.302 ; D27.3 118.5,36.975 117.173,38.302
  Bottom Layer w0.2: v1(118.2,54.9) 122.483,59.183 122.483,69.017 121.2,70.3 R36.2
tire_led_rr_green: D27.2 D29.2 R42.2 | length 53.8
  Top Layer w0.2: D29.2 122.7,30.175 124.027,31.502 124.027,38.302 ; D27.2 122.7,36.975 124.027,38.302 ; v1@123.025,54.9 124.027,53.898 124.027,38.302
  Bottom Layer w0.2: R42.2 121.2,76.7 123.791,74.109 123.791,58.179 123,57.388 v1(123,54.9)
tire_led_rr_red: D27.1 D29.1 R43.2 | length 53.2
  Top Layer w0.2: D29.1 121.95,31.4 v1(123,31.4) ; D27.1 121.95,38.2 v1(123,38.2)
  Bottom Layer w0.2: R43.2 121.2,78.3 124.118,75.382 124.118,58.044 123.7,57.625 123.7,38.9 ; v1(123,31.4) 123.7,32.1 123.7,38.9 ; v1(123,38.2) 123.7,38.9
pads on no net: Tire_LEDs.1 Tire_LEDs.2 Tire_LEDs.3 Tire_LEDs.4 Tire_LEDs.15 Tire_LEDs.16

## Polygon pours and split planes (outlines as drawn)
GND on Bottom Layer "GND_L02_P000" (solid, remove dead copper, pour order 0): 10,80.3 126,80.3 126,10 10,10
GND on Top Layer "GND_L01_P001" (solid, pour order 1): 10,80.3 126,80.3 126,10 10,10

## Silkscreen, mask and mechanical layers (free items; w line width, h text height)
Bottom Overlay:
  drawing of 33 lines, arcs and shapes, not listed
Boardoutline:
  lines w0.2: 10,10 10,80.3 126,80.3 126,10 10,10 ; 20,23 20,57 116,57 116,23 20,23

## Text inside footprints (layer, text, board x,y; h text height)
D1: Top Overlay "+" at 56.3,65.55 h0.76 r180
D2: Top Overlay "+" at 26.3,65.55 h0.76 r180
D3: Top Overlay "+" at 32.3,65.55 h0.76 r180
D4: Top Overlay "+" at 38.3,65.55 h0.76 r180
D5: Top Overlay "+" at 44.3,65.55 h0.76 r180
D6: Top Overlay "+" at 62.3,65.55 h0.76 r180
D7: Top Overlay "+" at 80.3,65.55 h0.76 r180
D8: Top Overlay "+" at 68.3,65.55 h0.76 r180
D9: Top Overlay "+" at 74.3,65.55 h0.76 r180
D10: Top Overlay "+" at 86.3,65.55 h0.76 r180
D11: Top Overlay "+" at 92.3,65.55 h0.76 r180
D12: Top Overlay "+" at 98.3,65.55 h0.76 r180
D13: Top Overlay "+" at 104.3,65.55 h0.76 r180
D14: Top Overlay "+" at 110.3,65.55 h0.76 r180
D15: Top Overlay "+" at 50.3,65.55 h0.76 r180
D16: Top Overlay "+" at 34.02,19.55 h0.76 r180
D17: Top Overlay "+" at 47.73,19.55 h0.76 r180
D18: Top Overlay "+" at 61.44,19.55 h0.76 r180
D19: Top Overlay "+" at 75.16,19.55 h0.76 r180
D20: Top Overlay "+" at 88.87,19.55 h0.76 r180
D21: Top Overlay "+" at 102.58,19.55 h0.76 r180
D22: Top Overlay "+" at 12.65,51.5 h0.8
D23: Top Overlay "+" at 118.65,51.5 h0.8
D24: Top Overlay "+" at 12.65,44.7 h0.8
D25: Top Overlay "+" at 118.65,44.7 h0.8
D26: Top Overlay "+" at 12.65,37.9 h0.8
D27: Top Overlay "+" at 118.65,37.9 h0.8
D28: Top Overlay "+" at 12.65,31.1 h0.8
D29: Top Overlay "+" at 118.65,31.1 h0.8
Main_Header: Bottom Overlay "2" at 45.96,72 h1.02 r180; Bottom Overlay "1" at 46.26,78.5 h1.02 r180; Bottom Overlay "33" at 89.44,78.5 h1.02 r180; Bottom Overlay "34" at 89.44,72 h1.02 r180